# Altium PCB mySensor_PCB.PcbDoc
Units mm, origin at the board's own origin, x right, y up, seen from the top; angles counter-clockwise.
Board outline 32.51 x 26.8 mm, 2 copper layers (Top Layer, Bottom Layer); 16 components, 11 nets, 68 pads, 22 vias.
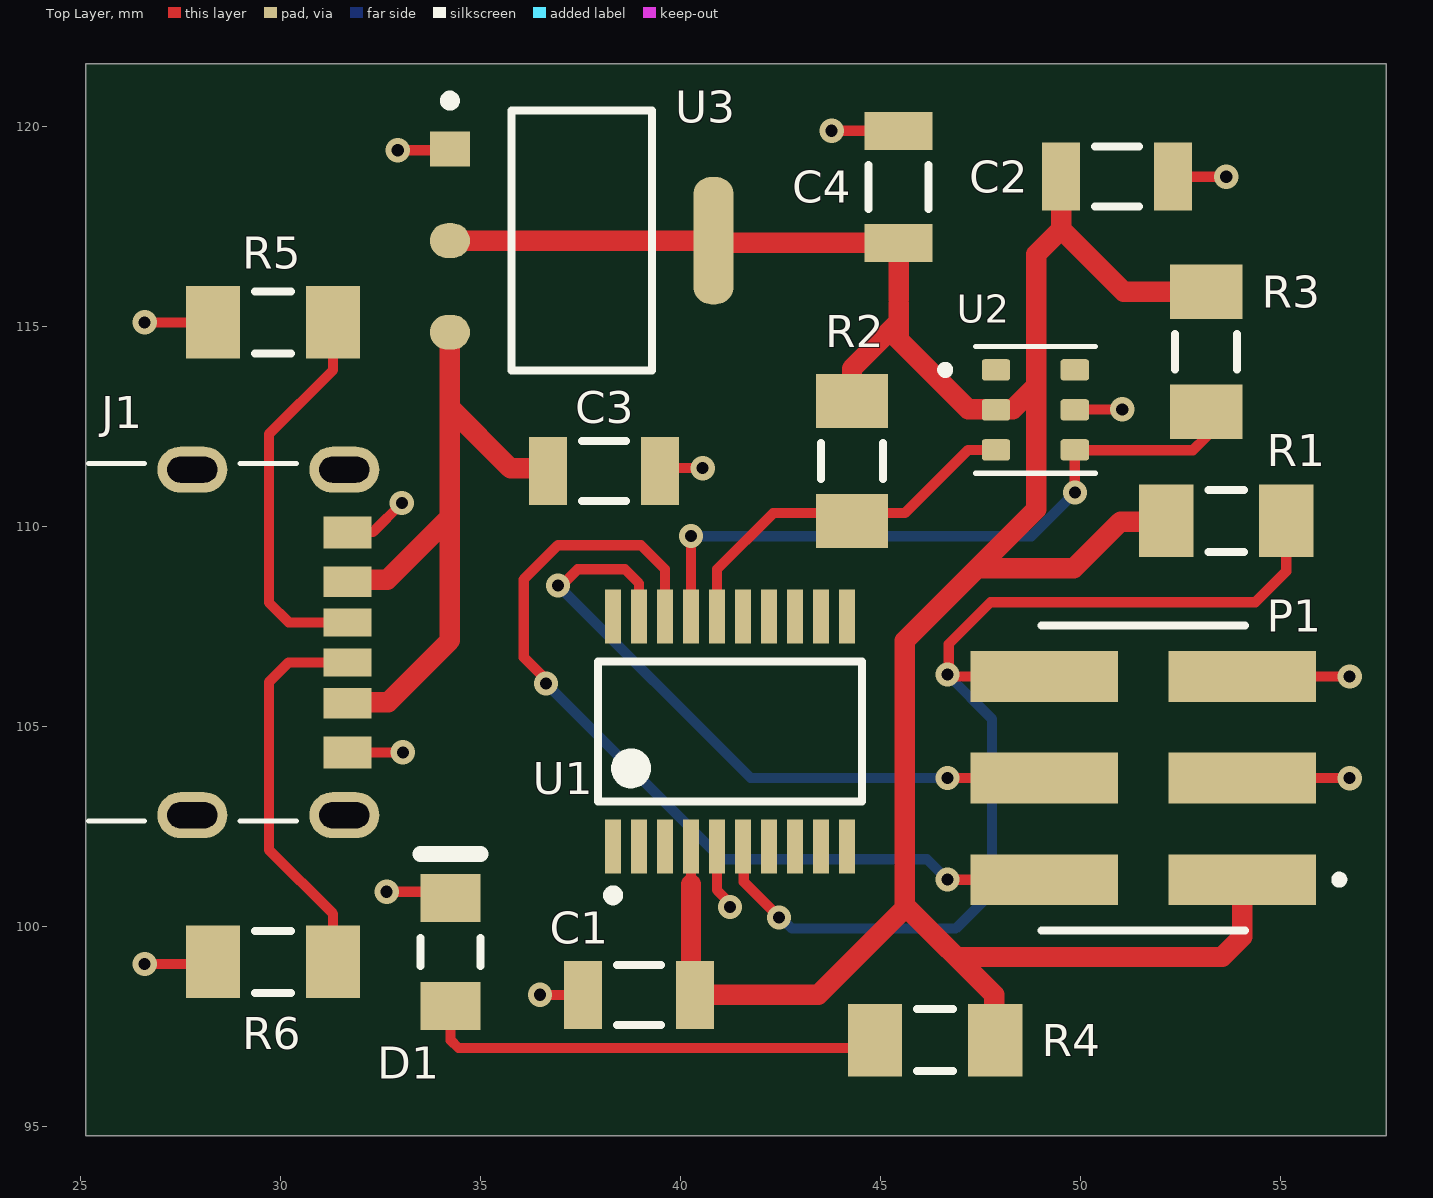
[diagram p0: Top Layer view]
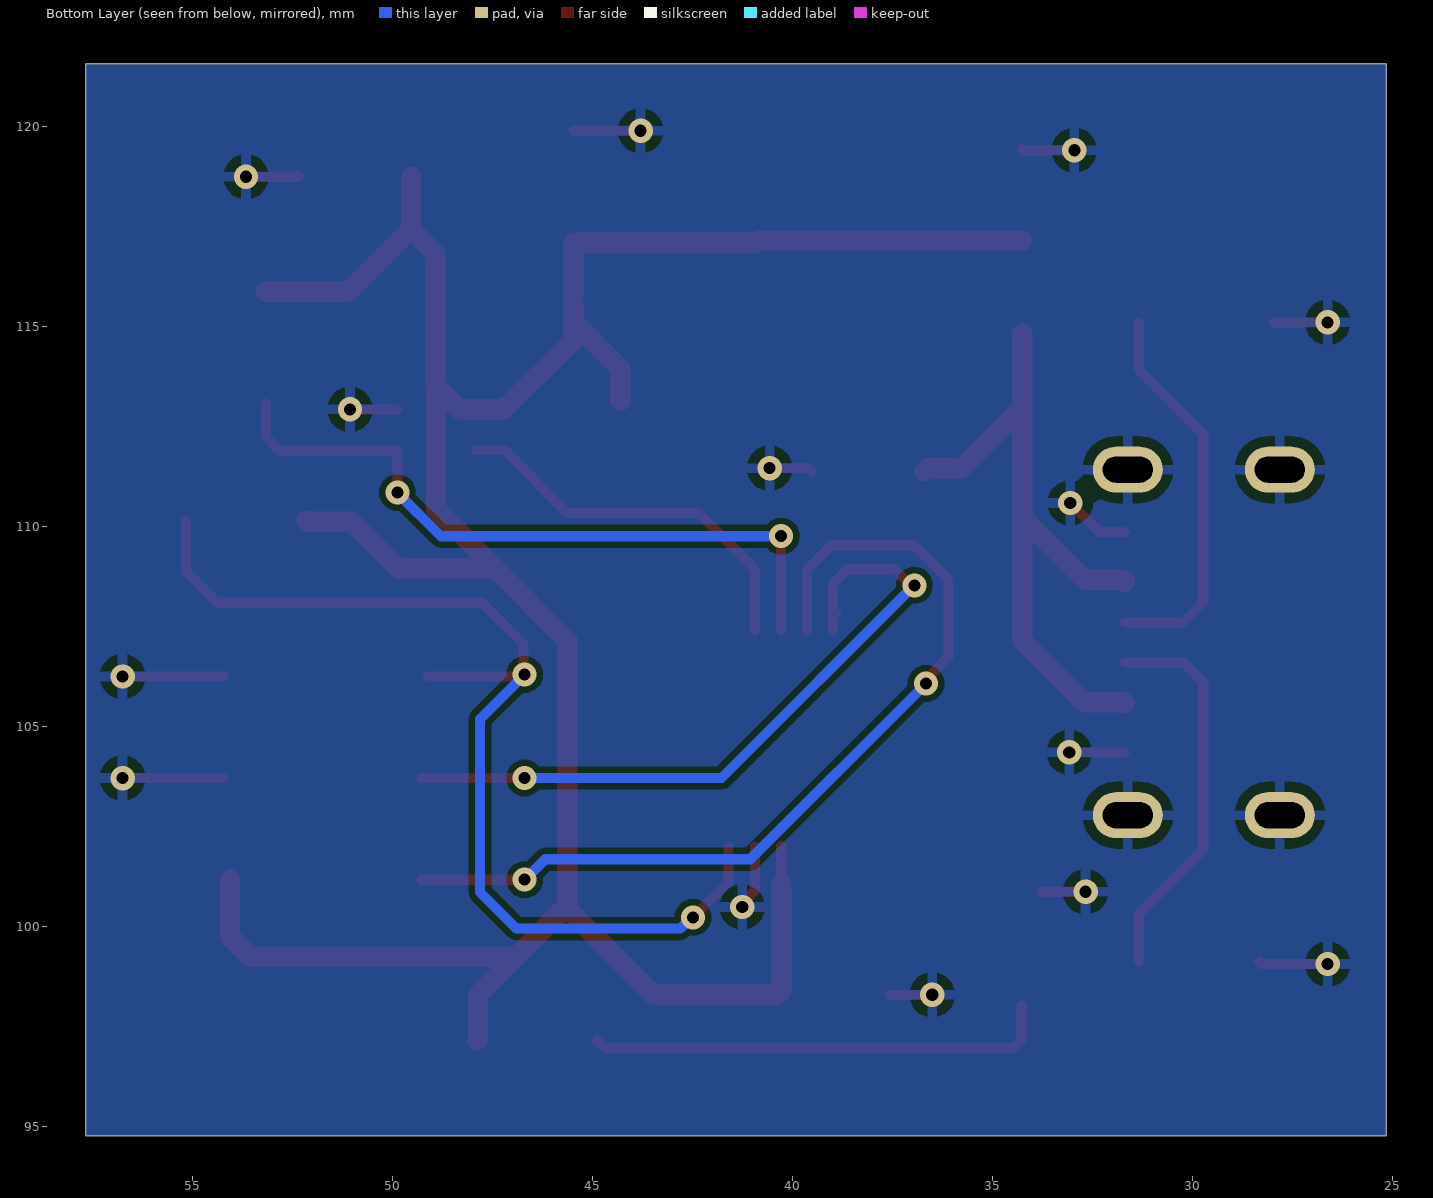
[diagram p1: Bottom Layer view, seen from below]
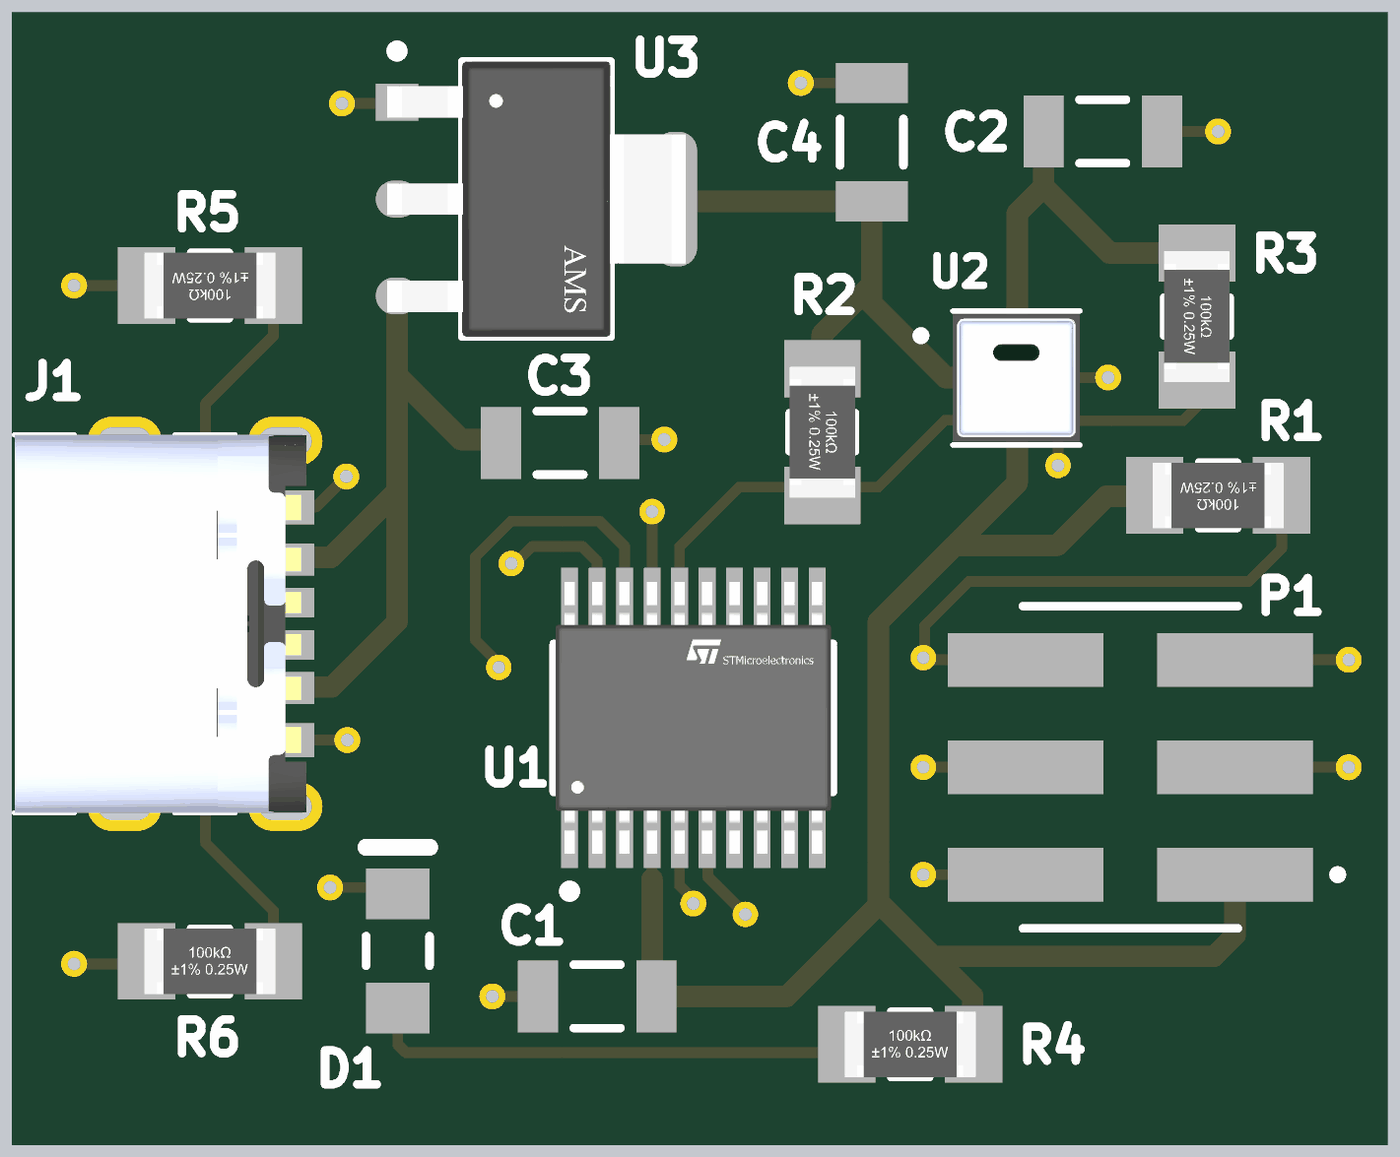
[diagram p2: 3D render of the assembled board from above, using the file's embedded part models]

## Layer stack, top to bottom
Top Solder: solder mask 0.0102, Solder Resist, Dk 3.5
Top Layer: signal copper 0.0356
Dielectric 1: dielectric 0.32, FR-4, Dk 4.8
Bottom Layer: signal copper 0.0356
Bottom Solder: solder mask 0.0102, Solder Resist, Dk 3.5

## Board outline
25.144,94.767 57.658,94.767 57.658,121.564 25.144,121.564

## Design rules (kind name [scope] priority, off if disabled: settings)
Clearance [All] p1: gap=0.152 ignorepadtopadclearanceinfootprint=FALSE
MinimumSolderMaskSliver [All] p1: minsoldermaskwidth=0.1
PolygonConnect [All] p1: connectstyle=Relief reliefconductorwidth=0.254 reliefentries=4 polygonreliefangle="90 Angle" airgapwidth=0.254
RoutingVias [All] p1: holewidth=0.711 width=1.27 viastyle="Through Hole" minholewidth=0.711 minwidth=1.27 maxholewidth=0.711 maxwidth=1.27
SilkToSilkClearance [All] p1: silktosilkclearance=0.1
SilkToSolderMaskClearance [IsPad] p1: minsilkscreentomaskgap=0.1 clearancetoexposedcopper=TRUE
SolderMaskExpansion [All] p1: expansion=0 istentingtop=FALSE
SupplyNets "Schematic Supply Nets" [InNet('GND')] p1: voltage=0.000
Width [All] p1: maxlimit=1.016 minlimit=0.203 preferedwidth=0.254 minimp=50.000000 maximp=50.000000 favimp=50.000000
27 further rules are at their usual default settings.

## Components (designator, comment, footprint, x,y, rotation, side; value= is the part's Value field where it differs from the comment)
C1 "100nF" CAPC1206(3216)190_L 38.975,98.289 r0 top value=10uF
C2 "10uF" CAPC1206(3216)190_L 50.927,118.745 r0 top
C3 "10uF" CAPC1206(3216)190_L 38.1,111.379 r180 top
C4 "10uF" CAPC1206(3216)190_L 45.466,118.491 r90 top
D1 "LED Blue" LUMX-SML-LX1206IC_V 34.265,99.365 r90 top
J1 "USB-C" AMPHENOL_10164359-00011LF 28.658,107.1 r270 top
P1 "Header 3X2" SAMTEC_TSM-103-02-T-DV-LC 51.58,103.708 r270 top
R1 "10k" FP-CRGCQ1206-IPC_A 53.653,110.137 r180 top value=4.7KΩ
R2 "4.7k" FP-CRGCQ1206-IPC_A 44.298,111.633 r270 top value=4.7KΩ
R3 "4.7k" FP-CRGCQ1206-IPC_A 53.153,114.367 r270 top value=4.7KΩ
R4 "330R" FP-CRGCQ1206-IPC_A 46.376,97.155 r0 top value=4.7KΩ
R5 "5.1k" FP-CRGCQ1206-IPC_A 29.825,115.1 r180 top value=4.7KΩ
R6 "5.1k" FP-CRGCQ1206-IPC_A 29.825,99.116 r0 top value=4.7KΩ
U1 "STM32G030F6P6" FP-TSSOP20-YA-MFG 41.25,104.877 r90 top
U2 "AHT20" PSON100P300X300X110-6N 48.884,112.914 r0 top
U3 "AMS1117-3.3" FP-AMS1117-IPC_C 37.541,117.145 r0 top

## Footprints (in the part's own frame and the unit in brackets; to place one, negate y for a bottom-side part, rotate by r counter-clockwise, add the part's x,y. Pads: shape width x height; smd on the part's side, far side on the other; paste and mask are expansions set on the pad)
AMPHENOL_10164359-00011LF [mm]
  rect 0.7x1.2 smd: A5(-0.5,3.03) B5(0.5,3.03)
  rect 0.76x1.2 smd: A9(1.52,3.03) B9(-1.52,3.03)
  rect 0.8x1.2 smd: A12(2.75,3.03) B12(-2.75,3.03)
  oval 1.15x1.75 hole 0.65 slot 1.25 at 90 deg: SH1(-4.32,2.95) SH2(4.32,2.95) SH3(-4.32,-0.85) SH4(4.32,-0.85)
  silkscreen extent -4.47,-3.45 4.47,1.76, body extent -4.47,-3.45 4.47,3.45, height 3.26
CAPC1206(3216)190_L [mm] "Chip Capacitor, Body 3.2x1.6mm, Height 1.9mm, IPC High Density"
  rect 0.95x1.7 smd: 1(-1.4,0) 2(1.4,0)
  silkscreen extent -0.55,-0.75 0.55,0.75, body extent -1.7,-0.9 1.7,0.9, height 1.9
FP-AMS1117-IPC_C [mm]
  rect 1.004x0.872 smd paste+0 mask+0: 1(-3.295,2.29)
  rrect100% 1.004x0.872 smd paste+0 mask+0: 2(-3.295,0) 3(-3.295,-2.29)
  rrect87% 1.004x3.182 smd paste+0 mask+0: 4(3.295,0)
  silkscreen extent -3.42,-3.25 1.75,3.62, body extent -3.9,-3.35 3.9,3.35, height 0.25
FP-CRGCQ1206-IPC_A [mm]
  rect 1.356x1.81 smd paste+0 mask+0: 1(-1.501,0) 2(1.501,0)
  silkscreen extent -0.45,-0.77 0.45,0.77, body extent -2.68,-1.4 2.68,1.4, height 0.25
FP-TSSOP20-YA-MFG [mm]
  rect 1.35x0.4 smd paste+0 mask+0: 1(-2.875,2.925) 2(-2.875,2.275) 3(-2.875,1.625) 4(-2.875,0.975) 5(-2.875,0.325) 6(-2.875,-0.325) 7(-2.875,-0.975) 8(-2.875,-1.625) 9(-2.875,-2.275) 10(-2.875,-2.925) 11(2.875,-2.925) 12(2.875,-2.275) 13(2.875,-1.625) 14(2.875,-0.975) 15(2.875,-0.325) 16(2.875,0.325) 17(2.875,0.975) 18(2.875,1.625) 19(2.875,2.275) 20(2.875,2.925)
  silkscreen extent -4.22,-3.3 1.75,3.3, body extent -3.65,-3.55 3.65,3.55, height 0.25
LUMX-SML-LX1206IC_V [mm] "SMD, 2-Leads, Body 3.2x1.5mm"
  rect 1.2x1.5 smd: 1(-1.35,0) 2(1.35,0)
  silkscreen extent -0.35,-0.75 2.45,0.75, body extent -1.6,-0.8 1.6,0.8, height 1.1
PSON100P300X300X110-6N [mm]
  rrect25% 0.71x0.53 smd: 1(-0.985,1) 2(-0.985,0) 3(-0.985,-1) 4(0.985,-1) 5(0.985,0) 6(0.985,1)
  silkscreen extent -2.35,-1.59 1.5,1.59, body extent -1.5,-1.5 1.5,1.5, height 1
SAMTEC_TSM-103-02-T-DV-LC [mm]
  rect 1.27x3.68 smd: 01(2.54,2.475) 02(2.54,-2.475) 03(0,2.475) 04(0,-2.475) 05(-2.54,2.475) 06(-2.54,-2.475)
  silkscreen extent -3.81,-2.54 3.81,5

## Part data
C1: library part CMP-1037-04963-1, "CAP 100nF", Case-EIA=1206, Case-Metric=3216, Rated Voltage="6.3 V", Tolerance=Â±20%, Max Thickness="1.9 mm", Technology=SMT
C2 C3 C4: library part CMP-1037-04963-1, "CAP 10uF 6.3V ±20% 1206 (3216 Metric) Thickness 1.9mm SMD", Case-EIA=1206, Case-Metric=3216, Rated Voltage="6.3 V", Tolerance=Â±20%, Max Thickness="1.9 mm", Technology=SMT
D1: library part CMP-2000-07123-1, "LED Red, 65 mW, -40 to 85 degC, 2-Pin SMD, RoHS, Tape and Reel", Color=Red, Manufacturer=Lumex, Operating Temperature=-25to85C, Package Description="2-Pin Surface Mount Device, Body 3.2 x 1.5 mm", Package Reference=SML-LX1206IC, Part No=SML-LX1206IC-TR, Reverse Voltage=5(Min)V, Supplier_Package=SMD, Datasheet URL=http://www.lumex.com/content/files/ProductAttachment/SML-LX1206IC-TR.pdf, Datasheet Version="Rev. J, 08/2012", Dimension=3.2x1.6x1.1mm, Dominant Wavelength=N/A, ECCN=EAR99, Family=SML-LX1206IC, HTS=8541402000, Intensity=6mcd, LED Material=GaAsP, Lens Appearance=ColorlessNonDiffused, Lens Dimensions=2x1.6x0.5mm, Manufacturer URL=http://www.lumexinstruments.com/, Mounting=SurfaceMount, Mounting Technology=SurfaceMount, Number of LEDs=1, Packaging=TapeandReel, Peak Wavelength=635nm, Pin_Count=2, RoHS=Unknown, Supplier=Lumex, Supplier Standard Pack=3,000, Type=Uni-Color, Viewing Angle=160
J1: library part 10164359-00011LF, "USB Type C Receptacle SMT Single Row 6Pin", Package=None, Check_prices=https://www.snapeda.com/parts/1016435900011LF/Amphenol/view-part/?ref=eda, MF=Amphenol, MP=1016435900011LF, SnapEDA_Link=https://www.snapeda.com/parts/1016435900011LF/Amphenol/view-part/?ref=snap
P1: library part TSM-103-02-T-DV-LC, "Conn Unshrouded Header HDR 6 POS 2.54mm Solder ST SMD Tube", Package=None, Check_prices=https://www.snapeda.com/parts/TSM-103-02-T-DV-LC/Samtec/view-part/?ref=eda, MF=Samtec, MP=TSM-103-02-T-DV-LC, SnapEDA_Link=https://www.snapeda.com/parts/TSM-103-02-T-DV-LC/Samtec/view-part/?ref=snap
R1: library part CMP-03211-006585-1, "CRGCQ 1206 10k 5%", Ambient Temperature Range High=+70°C, Manufacturer="TE Connectivity", Manufacturer Part Number=CRGCQ1206J4K7, Package=CRGCQ1206, Power Rating=0.25W, Resistance=4.7KΩ, Temperature="-55°C to +155°C", Temperature Coefficient=±100ppm/°C, Temperature Range High=+155°C, Temperature Range Low=-55°C, Tolerance=0.05, Voltage Rating=200V, Automotive=Yes, Automotive Grade="Grade 838", Category=Res, ComponentLink2Description=Datasheet, ComponentLink2URL=https://www.te.com/commerce/DocumentDelivery/DDEController?Action=showdoc&DocId=Data+Sheet%7F1773204-3%7F1%7Fpdf%7FEnglish%7FENG_DS_1773204-3_1.pdf%7F4-2176347-847, Composition="Thick Film", Device Class L1="Passive Components", Device Class L2=Resistors, Device Class L3="Chip SMD Resistors", Digikey Description="CRGCQ 1206 4K7 5%", Height=0.65mm, Ipc Land Pattern Name=RESC310155X55, Lead Free=Yes, Octopart=https://octopart.com/crgcq1206j4k7-te+connectivity-91018336, RoHS=TRUE, Series=CRGCQ
R2 R3: library part CMP-03211-006585-1, "CRGCQ 1206 4K7 5%", Ambient Temperature Range High=+70°C, Manufacturer="TE Connectivity", Manufacturer Part Number=CRGCQ1206J4K7, Package=CRGCQ1206, Power Rating=0.25W, Resistance=4.7KΩ, Temperature="-55°C to +155°C", Temperature Coefficient=±100ppm/°C, Temperature Range High=+155°C, Temperature Range Low=-55°C, Tolerance=0.05, Voltage Rating=200V, Automotive=Yes, Automotive Grade="Grade 838", Category=Res, ComponentLink2Description=Datasheet, ComponentLink2URL=https://www.te.com/commerce/DocumentDelivery/DDEController?Action=showdoc&DocId=Data+Sheet%7F1773204-3%7F1%7Fpdf%7FEnglish%7FENG_DS_1773204-3_1.pdf%7F4-2176347-847, Composition="Thick Film", Device Class L1="Passive Components", Device Class L2=Resistors, Device Class L3="Chip SMD Resistors", Digikey Description="CRGCQ 1206 4K7 5%", Height=0.65mm, Ipc Land Pattern Name=RESC310155X55, Lead Free=Yes, Octopart=https://octopart.com/crgcq1206j4k7-te+connectivity-91018336, RoHS=TRUE, Series=CRGCQ
R4: library part CMP-03211-006585-1, "CRGCQ 1206 330R 5%", Ambient Temperature Range High=+70°C, Manufacturer="TE Connectivity", Manufacturer Part Number=CRGCQ1206J4K7, Package=CRGCQ1206, Power Rating=0.25W, Resistance=4.7KΩ, Temperature="-55°C to +155°C", Temperature Coefficient=±100ppm/°C, Temperature Range High=+155°C, Temperature Range Low=-55°C, Tolerance=0.05, Voltage Rating=200V, Automotive=Yes, Automotive Grade="Grade 838", Category=Res, ComponentLink2Description=Datasheet, ComponentLink2URL=https://www.te.com/commerce/DocumentDelivery/DDEController?Action=showdoc&DocId=Data+Sheet%7F1773204-3%7F1%7Fpdf%7FEnglish%7FENG_DS_1773204-3_1.pdf%7F4-2176347-847, Composition="Thick Film", Device Class L1="Passive Components", Device Class L2=Resistors, Device Class L3="Chip SMD Resistors", Digikey Description="CRGCQ 1206 4K7 5%", Height=0.65mm, Ipc Land Pattern Name=RESC310155X55, Lead Free=Yes, Octopart=https://octopart.com/crgcq1206j4k7-te+connectivity-91018336, RoHS=TRUE, Series=CRGCQ
R5 R6: library part CMP-03211-006585-1, "CRGCQ 1206 5K1 5%", Ambient Temperature Range High=+70°C, Manufacturer="TE Connectivity", Manufacturer Part Number=CRGCQ1206J4K7, Package=CRGCQ1206, Power Rating=0.25W, Resistance=4.7KΩ, Temperature="-55°C to +155°C", Temperature Coefficient=±100ppm/°C, Temperature Range High=+155°C, Temperature Range Low=-55°C, Tolerance=0.05, Voltage Rating=200V, Automotive=Yes, Automotive Grade="Grade 838", Category=Res, ComponentLink2Description=Datasheet, ComponentLink2URL=https://www.te.com/commerce/DocumentDelivery/DDEController?Action=showdoc&DocId=Data+Sheet%7F1773204-3%7F1%7Fpdf%7FEnglish%7FENG_DS_1773204-3_1.pdf%7F4-2176347-847, Composition="Thick Film", Device Class L1="Passive Components", Device Class L2=Resistors, Device Class L3="Chip SMD Resistors", Digikey Description="CRGCQ 1206 4K7 5%", Height=0.65mm, Ipc Land Pattern Name=RESC310155X55, Lead Free=Yes, Octopart=https://octopart.com/crgcq1206j4k7-te+connectivity-91018336, RoHS=TRUE, Series=CRGCQ
U1: library part CMP-12105-000034-1, "ARM MICROCONTROLLERS - MCU", Ambient Temperature Range High=+85°C, Ambient Temperature Range Low=-40°C, Frequency=64MHz, Manufacturer=STMicroelectronics, Max Junction Temp=+105°C, Max Supply Voltage=3.6V, Min Supply Voltage=2V, Package=TSSOP20-YA, Temperature="-40°C to +85°C", Automotive=No, Category=IC, ComponentLink2Description=Datasheet, ComponentLink2URL=https://www.st.com/resource/en/datasheet/stm32g030f6.pdf, Core Architecture="ARM Cortex-M0+", Data Bus Width=32bits, Device Class L1="Integrated Circuits (ICs)", Device Class L2="Embedded Processors and Controllers", Device Class L3=Microcontrollers, Digikey Description="ARM MICROCONTROLLERS - MCU", Height=1.2mm, Interface=I2C,SPI,USART,LIN,IrDA,I2S,SMBus, Lead Free=Yes, Manufacturer Part Number=STM32G030F6P6, Memory Size=32KBytes, Memory Type=FLASH, Number Of A/D Converters=1, Number Of Adc Channels=16, Number Of Cores=1, Number Of I2C Channels=2, Number Of I/Os=17, Number Of Pwm Channels=11, Number Of Spi Channels=3, Number Of Timers/Counters=6, Number Of Uart Channels=2, Octopart=https://octopart.com/stm32g030f6p6-stmicroelectronics-103773023, Ram Size=8KBytes, RoHS=TRUE, Standoff Height=0.05mm, Temperature Range High=+85°C, Temperature Range Low=-40°C
U2: "Temperature and Humidity sensor", Package=Package, Check_prices=https://www.snapeda.com/parts/AHT20/Asair/view-part/?ref=eda, MF=Asair, MP=AHT20, SnapEDA_Link=https://www.snapeda.com/parts/AHT20/Asair/view-part/?ref=snap
U3: library part CMP-209535-000001-1, "LDO Voltage Regulators 1A, 3.3V", Dropout Voltage=1.1V, Manufacturer="Advanced Monolithic Systems", Max Junction Temp=+125°C, Max Power Dissipation=1.2W, Max Supply Voltage=15V, Nominal Supply Current=5mA, Output Current=1A, Output Voltage=3.3V, Package=AMS1117, Temperature="-40°C to +125°C", Temperature Range Low=-40°C, Automotive=No, Category=IC, ComponentLink2Description=Datasheet, ComponentLink2URL=http://www.advanced-monolithic.com/pdf/ds1117.pdf, Device Class L1="Integrated Circuits (ICs)", Device Class L2="Power Management ICs", Device Class L3="Voltage Regulators - Linear", Height=1.8mm, Ipc Land Pattern Name=SOT229P700X180-4, Lead Free=Yes, Manufacturer Part Number=AMS1117-3.3, Number Of Outputs=1, Octopart=https://octopart.com/ams1117-3.3-advanced+monolithic+systems-25899300, Output Type=Fixed, RoHS=TRUE, Standoff Height=0.64mm, Temperature Range High=+125°C

## Via types
v1: diameter 0.61, hole 0.305, Top Layer to Bottom Layer, 14 vias
v2: diameter 0.6, hole 0.3, Top Layer to Bottom Layer, 8 vias

## Nets (pads, with @x,y where several pads share a name; then routed paths per layer and width w, separated by ;. In a path a pad name is that pad's centre, name@x,y a point inside that pad or via, vN(x,y) a via of type N, cw(c..) or ccw(c..) an arc to the next point about the centre after c; other vN are vias at no path point)
GND: C1.1 C2.2 C3.1 C4.2 D1.2 J1.A12 J1.B12 J1.SH1 J1.SH2 J1.SH3 J1.SH4 P1.03 P1.05 R5.2 R6.1 U1.5 U2.5 U3.1 | length 21.6
  Top Layer w0.254: v1(26.613,99.059) 28.267,99.059 R6.1 ; v1(26.613,115.1) R5.2@27.969,115.1 ; J1.A12 v1(33.071,104.35) ; J1.B12 31.701,109.863 32.326,109.863 v1(33.047,110.584) ; v1(32.665,100.865) D1.2@33.765,100.865 ; v1(32.944,119.405) 34.216,119.405 U3.1 ; v1(36.5,98.289) C1.1 ; C3.1 39.579,111.458 v1(40.564,111.458) ; U1.5 40.925,100.906 41.25,100.581 v1(41.25,100.485) ; v1(43.79,119.891) C4.2 ; U2.5 49.874,112.919 51.048,112.919 v1(51.053,112.925) ; C2.2 52.329,118.743 v1(53.653,118.743) ; P1.03@54.215,103.708 v1(56.74,103.708) ; P1.05@54.215,106.248 v1(56.74,106.248)
NetD1_1: D1.1 R4.1 | length 11.6
  Top Layer w0.254: D1.1 34.265,97.155 34.461,96.959 44.679,96.959 R4.1
NetJ1_A5: J1.A5 R5.1 | length 9.8
  Top Layer w0.254: R5.1 31.326,113.911 29.721,112.306 29.721,108.097 30.218,107.6 J1.A5
NetJ1_B5: J1.B5 R6.2 | length 9.8
  Top Layer w0.254: R6.2 31.326,100.312 29.721,101.917 29.721,106.104 30.218,106.6 J1.B5
NRST: P1.06 R1.1 U1.6 | length 27.5
  Top Layer w0.254: U1.6 41.593,101.983 41.593,101.114 v2(42.479,100.228) ; P1.06 46.736,106.248 v2(46.685,106.299) 46.717,106.331 46.717,107.061 47.759,108.102 54.381,108.102 55.154,108.875 R1.1
  Bottom Layer w0.254: v2(42.479,100.228) 42.516,100.228 42.8,99.944 46.89,99.944 47.803,100.856 47.803,105.181 v2(46.685,106.299)
SCL: R2.2 U1.16 U2.3 | length 9.7
  Top Layer w0.254: U1.16@40.925,107.403 U1.16 40.925,108.929 42.328,110.332 45.619,110.332 47.201,111.914 U2.3
SDA: R3.2 U1.17 U2.4 | length 17.7
  Top Layer w0.254: U1.17@40.275,107.403 U1.17 v2(40.275,109.754) ; v2(49.869,110.844) U2.4 49.88,111.903 52.819,111.903 53.153,112.237 R3.2 R3.2@53.153,113.066
  Bottom Layer w0.254: v2(40.275,109.754) 48.779,109.754 v2(49.869,110.844)
SWCLK: P1.04 U1.19 | length 17.9
  Top Layer w0.254: v2(36.946,108.527) 37.04,108.527 37.442,108.929 38.622,108.929 38.975,108.577 U1.19 ; U1.19@38.906,107.821 U1.19 ; U1.19@38.975,107.403 U1.19 ; v2(46.685,103.708) P1.04@49.265,103.708
  Bottom Layer w0.254: v2(36.946,108.527) 41.765,103.708 v2(46.685,103.708)
SWDIO: P1.02 U1.18 | length 23.1
  Top Layer w0.254: v2(36.652,106.07) 36.652,106.168 36.093,106.727 36.093,108.676 36.946,109.529 39.025,109.529 39.625,108.929 U1.18 U1.18@39.625,107.403 ; v2(46.685,101.168) P1.02@49.265,101.168
  Bottom Layer w0.254: v2(36.652,106.07) 41.044,101.679 46.175,101.679 v2(46.685,101.168)
VCC_3V3: C1.2 C2.1 C4.1 P1.01 R1.2 R2.1 R3.1 R4.2 U1.4 U2.2 U3.2 U3.4 | length 72.7
  Top Layer w0.254: 40.273,101.056 40.273,102 U1.4 U1.4@40.273,102.004
  Top Layer w0.508: U3.2 U3.4 40.889,117.091 C4.1 45.466,115.679 ; 40.273,101.056 40.275,101.054 40.275,98.389 C1.2 43.459,98.289 45.621,100.451 45.621,100.523 ; R2.1 44.298,113.944 45.466,115.112 ; 45.466,115.561 45.466,115.112 ; 46.978,99.237 53.557,99.237 54.055,99.735 P1.01 ; 47.853,98.24 47.853,97.18 R4.2 ; 47.853,98.291 45.621,100.523 ; 48.906,113.513 48.906,116.807 49.529,117.431 ; C2.1 49.529,118.743 49.529,117.431 ; R1.2 52.131,110.116 51.01,110.116 49.847,108.954 47.428,108.954 ; R3.1 51.092,115.868 49.529,117.431 ; 45.466,115.112 45.466,114.664 47.205,112.925 47.888,112.925 U2.2 47.91,112.925 48.314,112.925 48.902,113.513 48.902,110.428 47.428,108.954 ; 45.621,100.523 45.621,107.147 47.428,108.954
VCC_5V: C3.2 J1.A9 J1.B9 U3.3 | length 17.2
  Top Layer w0.508: J1.A9 31.712,105.605 32.705,105.605 34.246,107.146 34.246,110.234 ; J1.B9 31.737,108.669 32.68,108.669 34.246,110.234 ; U3.3@34.246,114.823 34.246,112.973 ; C3.2 36.621,111.458 35.761,111.458 34.246,112.973 ; 34.246,110.234 34.246,112.973
pads on no net: U1.1 U1.2 U1.3 U1.7 U1.8 U1.9 U1.10 U1.11 U1.12 U1.13 U1.14 U1.15 U1.20 U2.1 U2.6

## Polygon pours and split planes (outlines as drawn)
GND on Bottom Layer "GND_L02_P000" (solid, pour order 0): 25.144,94.767 57.658,94.767 57.658,121.564 25.144,121.564

## Silkscreen, mask and mechanical layers (free items; w line width, h text height)
Top 3D Body:
  lines w0.1: 49.2,107.518 49.2,99.898 54.28,99.898 54.28,107.518
Top Courtyard:
  lines w0.05: 47.175,99.648 56.305,99.648 56.305,107.768 47.175,107.768 47.175,99.648

## Text inside footprints (layer, text, board x,y; h text height)
J1: Top 3D Body "PCB EDGE" at 25.558,101.6 h1.27 r270